# Altium PCB ComparatorV2.PcbDoc
Units mm, origin at the board's own origin, x right, y up, seen from the top; angles counter-clockwise.
Board outline 25.27 x 22.1 mm, 2 copper layers (Top Layer, Bottom Layer); 9 components, 6 nets, 27 pads, 0 vias.
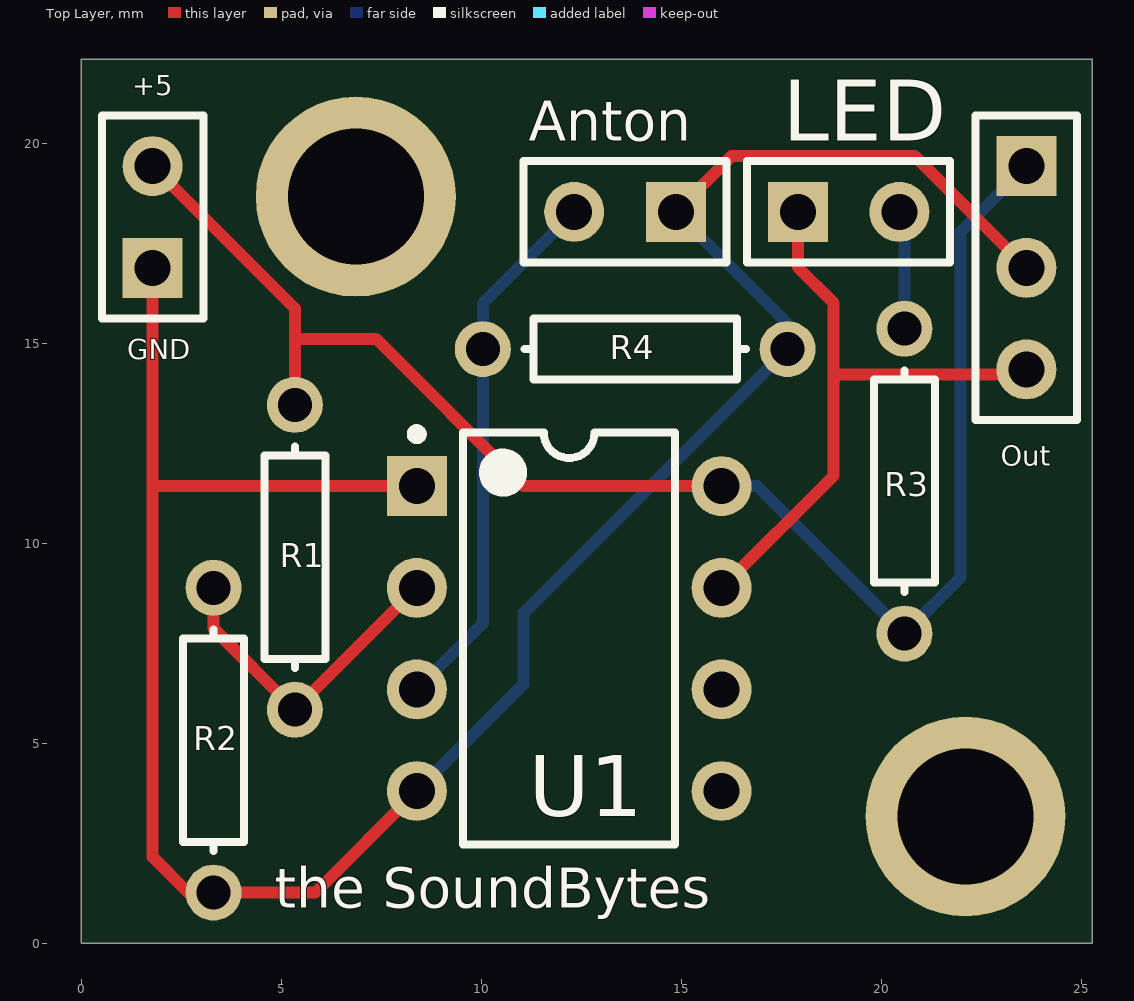
[diagram p0: Top Layer view]
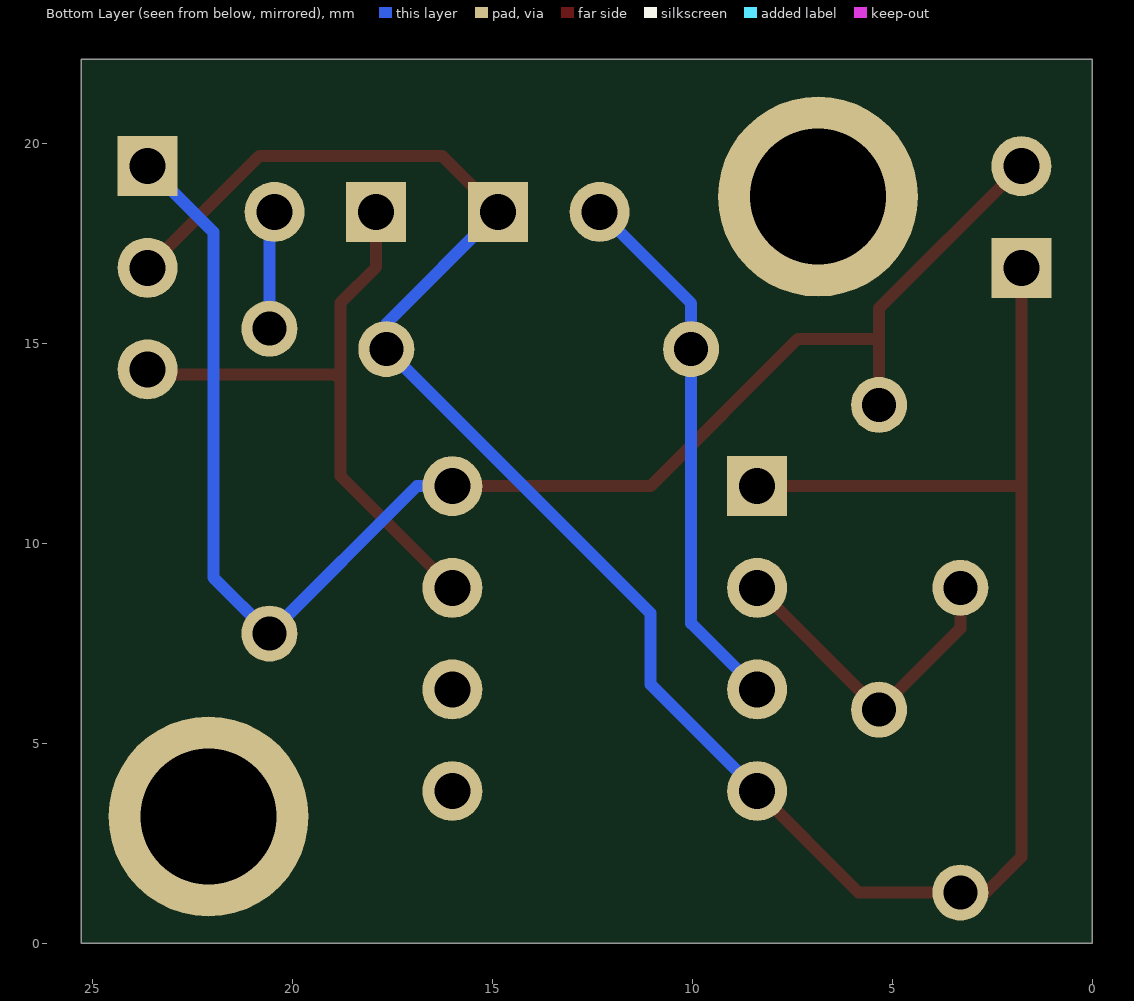
[diagram p1: Bottom Layer view, seen from below]

## Layer stack, top to bottom
Top Solder: solder mask 0.0102, Solder Resist, Dk 3.5
Top Layer: signal copper 0.0356
Dielectric 1: dielectric 0.32, FR-4, Dk 4.8
Bottom Layer: signal copper 0.0356
Bottom Solder: solder mask 0.0102, Solder Resist, Dk 3.5

## Board outline
0,0 25.273,0 25.273,22.098 0,22.098 0,0

## Design rules (kind name [scope] priority, off if disabled: settings)
Clearance [All] p1: gap=0.3
PolygonConnect [All] p1: connectstyle=Relief reliefconductorwidth=0.254 reliefentries=4 polygonreliefangle="90 Angle" airgapwidth=0.254
RoomDefinition Sheet2 [InComponentClass('Sheet2')] p1: confinementstyle=ConfineIn formatcopy=TRUE lockcomponents=FALSE outline -34.29,-102.362 16.51,-102.362 16.51,-76.962 -34.29,-76.962
RoutingVias [All] p1: holewidth=0.711 width=1.27 viastyle="Through Hole" minholewidth=0.711 minwidth=1.27 maxholewidth=0.711 maxwidth=1.27
SolderMaskExpansion [All] p1: expansion=0.102
Width [All] p1: maxlimit=0.3 minlimit=0.25 preferedwidth=0.3
30 further rules are at their usual default settings.

## Classes and differential pairs
component class Sheet2: LED R1 R2 R3 R4 U1 ""

## Components (designator, comment, footprint, x,y, rotation, side; value= is the part's Value field where it differs from the comment)
LED "Header 2" HDR1X2 17.907,18.288 r0 top
P1 "Header 2" HDR1X2 14.859,18.288 r180 top
P2 "Header 3" HDR1X3 23.622,19.431 r270 top
P3 "Header 2" HDR1X2 1.778,16.891 r90 top
R1 "R1" AXIAL-0.3 5.334,9.652 r90 top
R2 "R2" AXIAL-0.3 3.302,5.08 r90 top
R3 "R3" AXIAL-0.3 20.574,11.557 r270 top
R4 "R4" AXIAL-0.3 13.843,14.859 r180 top
U1 "LM311N" N08E 12.192,7.62 r0 top

## Footprints (in the part's own frame and the unit in brackets; to place one, negate y for a bottom-side part, rotate by r counter-clockwise, add the part's x,y. Pads: shape width x height; smd on the part's side, far side on the other; paste and mask are expansions set on the pad)
AXIAL-0.3 [mm] "Axial Device, Thru-Hole; 2 Leads; 0.3 in Pin Spacing"
  round 1.4 hole 0.85: 1(-3.81,0) 2(3.81,0)
  silkscreen extent -2.77,-0.76 2.77,0.76
HDR1X2 [mm] "Connector; Header; 2 Position"
  rect 1.5x1.5 hole 0.9: 1(0,0)
  round 1.5 hole 0.9: 2(2.54,0)
  silkscreen extent -1.27,-1.27 3.81,1.27
HDR1X3 [mm] "Connector; Header; 3 Position"
  rect 1.5x1.5 hole 0.9: 1(0,0)
  round 1.5 hole 0.9: 2(2.54,0) 3(5.08,0)
  silkscreen extent -1.27,-1.27 6.35,1.27
N08E [mm] "DIP, 8-Leads, Row Spacing 7.62mm, Pitch 2.54mm, Body 9.91x6.35mm"
  rect 1.5x1.5 hole 0.9: 1(-3.81,3.81)
  round 1.5 hole 0.9: 2(-3.81,1.27) 3(-3.81,-1.27) 4(-3.81,-3.81) 5(3.81,-3.81) 6(3.81,-1.27) 7(3.81,1.27) 8(3.81,3.81)
  silkscreen extent -3.93,-5.15 2.65,5.23, body extent -3.6,-5.15 3.6,5.15, height 5.34

## Part data
LED P1 P3: "Header, 2-Pin"
P2: "Header, 3-Pin"
R1 R2 R3 R4: library part Res1, "Resistor"
U1: library part LM741CN, "Operational Amplifier, 8-pin MDIP"

## Free pads (board coordinates)
  round 5 hole 3.4: 3(22.098,3.175) 4(6.858,18.669)

## Nets (pads, with @x,y where several pads share a name; then routed paths per layer and width w, separated by ;. In a path a pad name is that pad's centre, name@x,y a point inside that pad or via, vN(x,y) a via of type N, cw(c..) or ccw(c..) an arc to the next point about the centre after c; other vN are vias at no path point)
NetLED_1: LED.1 P2.3 U1.7 | length 15.9
  Top Layer w0.3: U1.7 18.803,11.691 18.803,14.097 ; LED.1 17.907,16.905 18.803,16.009 18.803,14.097 ; P2.3 23.622,14.217 18.923,14.217 18.803,14.097
NetLED_2: LED.2 R3.1 | length 3.2
  Top Layer w0.3: LED.2 LED.2@20.574,18.161
  Bottom Layer w0.3: LED.2 20.574,18.161 R3.1
NetP1_1: P1.1 P2.2 P3.1 R2.1 R4.1 U1.1 U1.4 | length 59.3
  Top Layer w0.3: P3.1 1.778,11.43 ; U1.4 5.842,1.27 R2.1 2.667,1.27 1.778,2.159 1.778,11.43 ; U1.1 1.778,11.43 ; P1.1 16.256,19.685 20.828,19.685 P2.2
  Bottom Layer w0.3: U1.4 11.049,6.477 11.049,8.255 R4.1 17.653,15.494 P1.1
NetP1_2: P1.2 R4.2 U1.3 | length 13.6
  Bottom Layer w0.3: U1.3 10.033,8.001 R4.2 10.033,16.002 P1.2
NetP2_1: P2.1 P3.2 R1.2 R3.2 U1.8 | length 38.4
  Top Layer w0.3: P3.2 5.334,15.875 5.334,15.113 ; R1.2 5.334,15.113 ; U1.8@15.748,11.43 11.049,11.43 7.366,15.113 5.334,15.113
  Bottom Layer w0.3: U1.8 16.891,11.43 R3.2 21.971,9.144 21.971,17.78 P2.1
NetR1_1: R1.1 R2.2 U1.2 | length 8.2
  Top Layer w0.3: R2.2 3.302,7.874 R1.1 U1.2
pads on no net: U1.5 U1.6

## Silkscreen, mask and mechanical layers (free items; w line width, h text height)
Top Overlay:
  text "+5" at 1.27,21.209 h0.5
  text "Anton" at 11.176,20.066 h1
  text "GND" at 1.143,14.605 h0.5
  text "Out" at 22.987,11.938 h0.5
  text "the SoundBytes" at 4.826,0.889 h1